# Altium PCB Arduino NG Ahuratus-PCB.PcbDoc (part 3 of 6)
Units mm, origin at the board's own origin, x right, y up, seen from the top; angles counter-clockwise.
Board outline 69 x 53.5 mm, 2 copper layers (Top Layer, Bottom Layer); 37 components, 49 nets, 193 pads, 40 vias.
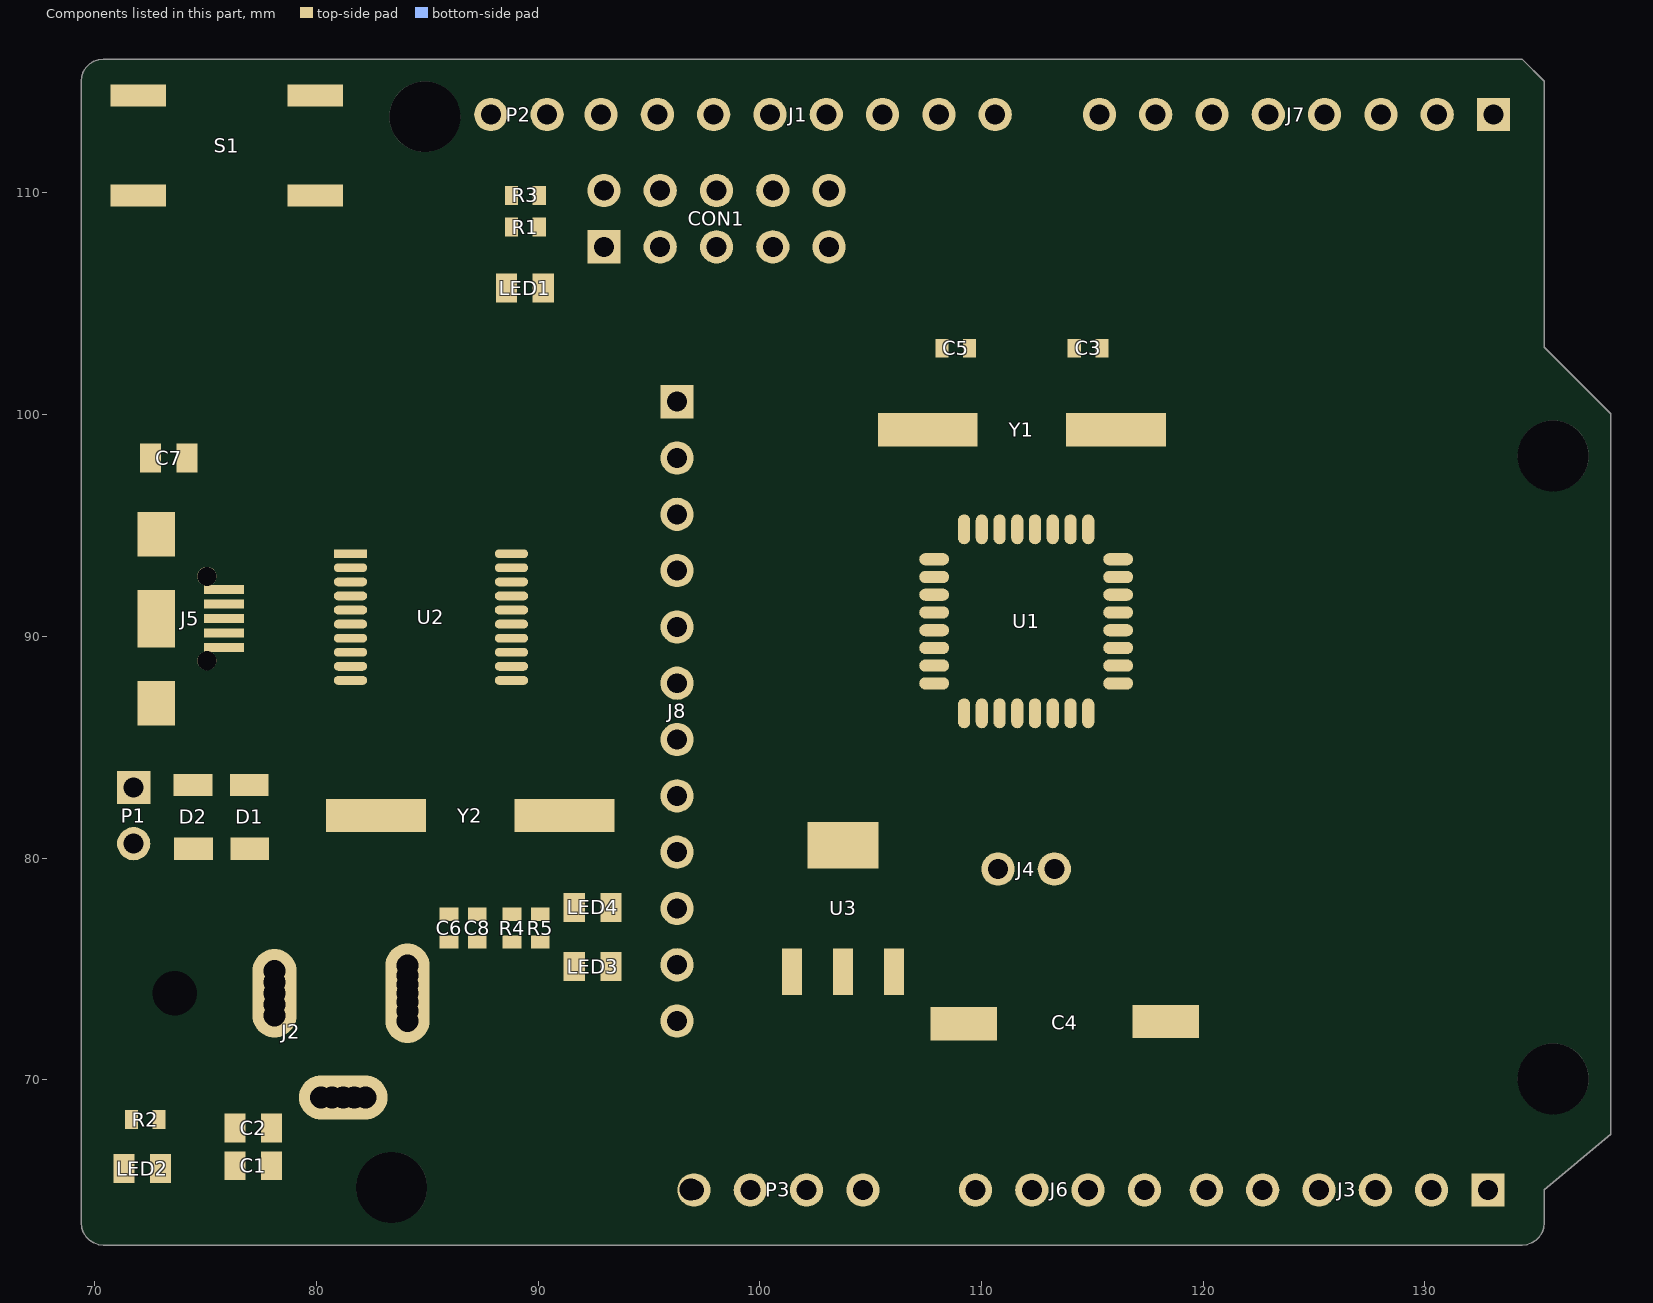
[diagram p3: the components of this part, seen from the top]

## Via types
v1: diameter 1.27, hole 0.711, Top Layer to Bottom Layer, 40 vias

## Nets (pads, with @x,y where several pads share a name; then routed paths per layer and width w, separated by ;. In a path a pad name is that pad's centre, name@x,y a point inside that pad or via, vN(x,y) a via of type N, cw(c..) or ccw(c..) an arc to the next point about the centre after c; other vN are vias at no path point) (continued)
copper on no net: (continued)
  Bottom Layer w0.025: 77.978,80.264 78.181,80.264 ; 77.978,80.289 78.181,80.289 ; 77.978,80.315 78.181,80.315 ; 77.978,80.34 78.156,80.34 ; 77.978,80.366 78.156,80.366 ; 77.978,80.391 78.156,80.391 ; 77.978,80.416 78.156,80.416 ; 77.978,80.442 78.156,80.442 ; 77.978,80.467 78.156,80.467 ; 77.978,80.493 78.156,80.493 ; 77.978,80.518 78.181,80.518 ; 77.978,80.543 78.181,80.543 ; 77.978,80.569 78.181,80.569 ; 77.978,80.594 78.181,80.594 ; 77.978,80.62 78.181,80.62 ; 77.978,80.645 78.207,80.645 ; 78.003,80.137 78.207,80.137 ; 78.003,80.162 78.207,80.162 ; 78.003,80.188 78.207,80.188 ; 78.003,80.213 78.181,80.213 ; 78.003,80.239 78.181,80.239 ; 78.003,80.67 78.207,80.67 ; 78.003,80.696 78.207,80.696 ; 78.003,80.721 78.232,80.721 ; 78.003,80.747 78.232,80.747 ; 78.029,80.061 78.232,80.061 ; 78.029,80.086 78.232,80.086 ; 78.029,80.112 78.232,80.112 ; 78.029,80.772 78.232,80.772 ; 78.029,80.797 78.257,80.797 ; 78.029,80.823 78.257,80.823 ; 78.054,80.01 78.283,80.01 ; 78.054,80.035 78.257,80.035 ; 78.054,80.848 78.283,80.848 ; 78.054,80.874 78.308,80.874 ; 78.08,79.959 78.308,79.959 ; 78.08,79.985 78.283,79.985 ; 78.08,80.899 78.308,80.899 ; 78.105,79.908 78.334,79.908 ; 78.105,79.934 78.308,79.934 ; 78.105,80.924 78.334,80.924 ; 78.105,80.95 78.359,80.95 ; 78.13,79.858 78.384,79.858 ; 78.13,79.883 78.359,79.883 ; 78.13,80.975 78.359,80.975 ; 78.13,81.001 78.384,81.001 ; 78.156,79.832 78.41,79.832 ; 78.156,81.026 78.41,81.026 ; 78.181,79.781 78.461,79.781 ; 78.181,79.807 78.435,79.807 ; 78.181,81.051 78.435,81.051 ; 78.181,81.077 78.461,81.077 ; 78.207,79.756 78.486,79.756 ; 78.207,81.102 78.486,81.102 ; 78.232,79.731 78.511,79.731 ; 78.232,81.128 78.537,81.128 ; 78.257,79.705 78.562,79.705 ; 78.257,81.153 78.562,81.153 ; 78.257,81.178 78.613,81.178 ; 78.283,79.68 78.613,79.68 ; 78.283,81.204 78.638,81.204 ; 78.308,79.654 78.664,79.654 ; 78.308,81.229 78.689,81.229 ; 78.334,81.255 78.765,81.255 ; 78.359,79.629 78.715,79.629 ; 78.359,81.28 78.842,81.28 ; 78.384,79.604 78.791,79.604 ; 78.384,81.305 79.807,81.305 ; 78.41,79.578 78.918,79.578 ; 78.435,81.331 79.781,81.331 ; 78.461,79.553 79.705,79.553 ; 78.461,81.356 79.756,81.356 ; 78.486,79.527 79.705,79.527 ; 78.511,81.382 79.756,81.382 ; 78.537,79.502 79.705,79.502 ; 78.562,81.407 79.756,81.407 ; 78.588,79.477 79.477,79.477 ; 78.588,83.007 79.502,83.007 ; 78.588,83.033 79.502,83.033 ; 78.588,83.058 79.502,83.058 ; 78.588,83.083 79.502,83.083 ; 78.588,83.109 79.477,83.109 ; 78.588,83.134 79.477,83.134 ; 78.613,82.779 79.502,82.779 ; 78.613,82.804 79.502,82.804 ; 78.613,82.829 79.502,82.829 ; 78.613,82.855 79.502,82.855 ; 78.613,82.88 79.502,82.88 ; 78.613,82.906 79.502,82.906 ; 78.613,82.931 79.502,82.931 ; 78.613,82.956 79.502,82.956 ; 78.613,82.982 79.502,82.982 ; 78.613,83.16 79.477,83.16 ; 78.638,79.451 79.4,79.451 ; 78.638,81.432 79.731,81.432 ; 78.638,82.575 79.426,82.575 ; 78.638,82.601 79.451,82.601 ; 78.638,82.626 79.451,82.626 ; 78.638,82.652 79.477,82.652 ; 78.638,82.677 79.502,82.677 ; 78.638,82.702 79.502,82.702 ; 78.638,82.728 79.502,82.728 ; 78.638,82.753 79.502,82.753 ; 78.638,83.185 79.477,83.185 ; 78.664,82.372 79.299,82.372 ; 78.664,82.398 79.299,82.398 ; 78.664,82.423 79.324,82.423 ; 78.664,82.448 79.35,82.448 ; 78.664,82.474 79.35,82.474 ; 78.664,82.499 79.375,82.499 ; 78.664,82.525 79.4,82.525 ; 78.664,82.55 79.4,82.55 ; 78.689,81.458 79.731,81.458 ; 78.689,82.22 79.197,82.22 ; 78.689,82.245 79.223,82.245 ; 78.689,82.271 79.223,82.271 ; 78.689,82.296 79.248,82.296 ; 78.689,82.321 79.273,82.321 ; 78.689,82.347 79.273,82.347 ; 78.689,83.21 79.477,83.21 ; 78.715,82.144 79.146,82.144 ; 78.715,82.169 79.172,82.169 ; 78.715,82.194 79.172,82.194 ; 78.715,83.236 79.477,83.236 ; 78.74,79.426 79.324,79.426 ; 78.74,81.483 79.705,81.483 ; 78.74,82.067 79.096,82.067 ; 78.74,82.093 79.121,82.093 ; 78.74,82.118 79.121,82.118 ; 78.74,83.261 79.477,83.261 ; 78.765,82.017 79.07,82.017 ; 78.765,82.042 79.096,82.042 ; 78.765,84.201 79.629,84.201 ; 78.765,84.226 79.629,84.226 ; 78.765,84.252 79.629,84.252 ; 78.765,84.277 79.654,84.277 ; 78.765,84.303 79.654,84.303 ; 78.765,84.328 79.654,84.328 ; 78.765,84.353 79.68,84.353 ; 78.765,84.379 79.68,84.379 ; 78.765,84.404 79.68,84.404 ; 78.765,84.43 79.705,84.43 ; 78.791,81.94 79.019,81.94 ; 78.791,81.966 79.045,81.966 ; 78.791,81.991 79.07,81.991 ; 78.791,83.287 79.477,83.287 ; 78.791,84.455 79.705,84.455 ; 78.791,84.48 79.705,84.48 ; 78.791,84.506 79.731,84.506 ; 78.791,84.531 79.731,84.531 ; 78.791,84.557 79.731,84.557 ; 78.791,84.582 79.756,84.582 ; 78.816,81.509 79.705,81.509 ; 78.816,81.89 78.969,81.89 ; 78.816,81.915 78.994,81.915 ; 78.816,83.312 79.477,83.312 ; 78.816,84.176 79.604,84.176 ; 78.816,84.607 79.756,84.607 ; 78.816,84.633 79.781,84.633 ; 78.816,84.658 79.781,84.658 ; 78.816,84.684 79.781,84.684 ; 78.842,81.864 78.918,81.864 ; 78.842,84.15 79.604,84.15 ; 78.842,84.709 79.807,84.709 ; 78.842,84.734 79.807,84.734 ; 78.842,84.76 79.832,84.76 ; 78.842,84.785 79.832,84.785 ; 78.867,79.4 79.223,79.4 ; 78.867,81.534 79.705,81.534 ; 78.867,83.337 79.477,83.337 ; 78.867,84.125 79.578,84.125 ; 78.867,84.811 79.858,84.811 ; 78.867,84.836 79.858,84.836 ; 78.892,83.363 79.477,83.363 ; 78.892,84.099 79.578,84.099 ; 78.892,84.861 79.883,84.861 ; 78.892,84.887 79.883,84.887 ; 78.892,84.912 79.908,84.912 ; 78.918,81.559 79.68,81.559 ; 78.918,84.938 79.908,84.938 ; 78.918,84.963 79.934,84.963 ; 78.943,81.585 79.68,81.585 ; 78.943,83.388 79.477,83.388 ; 78.943,83.414 79.477,83.414 ; 78.943,83.439 79.477,83.439 ; 78.943,84.074 79.578,84.074 ; 78.943,84.988 79.959,84.988 ; 78.943,85.014 79.959,85.014 ; 78.969,83.464 79.477,83.464 ; 78.969,83.49 79.477,83.49 ; 78.969,83.515 79.477,83.515 ; 78.969,83.541 79.477,83.541 ; 78.969,83.566 79.477,83.566 ; 78.969,83.591 79.477,83.591 ; 78.969,83.617 79.477,83.617 ; 78.969,84.049 79.553,84.049 ; 78.969,85.039 79.985,85.039 ; 78.969,85.065 79.985,85.065 ; 78.994,83.642 79.477,83.642 ; 78.994,83.668 79.477,83.668 ; 78.994,83.693 79.477,83.693 ; 78.994,83.718 79.477,83.718 ; 78.994,83.744 79.502,83.744 ; 78.994,83.769 79.502,83.769 ; 78.994,84.023 79.553,84.023 ; 78.994,85.09 80.01,85.09 ; 79.019,81.61 79.68,81.61 ; 79.019,83.795 79.502,83.795 ; 79.019,83.82 79.502,83.82 ; 79.019,83.845 79.502,83.845 ; 79.019,83.871 79.527,83.871 ; 79.019,83.896 79.527,83.896 ; 79.019,83.922 79.527,83.922 ; 79.019,85.115 80.035,85.115 ; 79.019,85.141 80.035,85.141 ; 79.045,83.947 79.527,83.947 ; 79.045,83.972 79.553,83.972 ; 79.045,83.998 79.553,83.998 ; 79.045,85.166 80.061,85.166 ; 79.07,85.192 80.086,85.192 ; 79.07,85.217 79.426,85.217 ; 79.096,81.636 79.68,81.636 ; 79.121,79.578 79.705,79.578 ; 79.146,81.661 79.68,81.661 ; 79.172,81.686 79.68,81.686 ; 79.197,81.712 79.654,81.712 ; 79.197,81.737 79.654,81.737 ; 79.223,81.763 79.654,81.763 ; 79.223,81.788 79.654,81.788 ; 79.248,81.28 79.807,81.28 ; 79.248,81.813 79.654,81.813 ; 79.248,81.839 79.654,81.839 ; 79.273,81.864 79.629,81.864 ; 79.273,81.89 79.629,81.89 ; 79.273,81.915 79.629,81.915 ; 79.299,79.604 79.731,79.604 ; 79.299,81.94 79.629,81.94 ; 79.299,81.966 79.629,81.966 ; 79.324,81.991 79.629,81.991 ; 79.324,82.017 79.629,82.017 ; 79.324,82.042 79.629,82.042 ; 79.35,79.629 79.731,79.629 ; 79.35,81.255 79.832,81.255 ; 79.35,82.067 79.629,82.067 ; 79.35,82.093 79.629,82.093 ; 79.375,78.943 79.604,78.943 ; 79.375,78.969 79.604,78.969 ; 79.375,78.994 79.604,78.994 ; 79.375,82.118 79.629,82.118 ; 79.375,82.144 79.629,82.144 ; 79.4,78.715 79.604,78.715 ; 79.4,78.74 79.604,78.74 ; 79.4,78.765 79.604,78.765 ; 79.4,78.791 79.604,78.791 ; 79.4,78.816 79.604,78.816 ; 79.4,78.842 79.604,78.842 ; 79.4,78.867 79.604,78.867 ; 79.4,78.892 79.604,78.892 ; 79.4,78.918 79.604,78.918 ; 79.4,79.019 79.604,79.019 ; 79.4,79.045 79.604,79.045 ; 79.4,79.07 79.604,79.07 ; 79.4,79.096 79.604,79.096 ; 79.4,79.121 79.604,79.121 ; 79.4,79.146 79.604,79.146 ; 79.4,79.172 79.604,79.172 ; 79.4,79.654 79.756,79.654 ; 79.4,81.229 79.832,81.229 ; 79.4,82.169 79.629,82.169 ; 79.4,82.194 79.629,82.194 ; 79.426,78.588 79.629,78.588 ; 79.426,78.613 79.629,78.613 ; 79.426,78.638 79.629,78.638 ; 79.426,78.664 79.604,78.664 ; 79.426,78.689 79.604,78.689 ; 79.426,79.197 79.604,79.197 ; 79.426,79.223 79.604,79.223 ; 79.426,79.248 79.629,79.248 ; 79.426,79.273 79.629,79.273 ; 79.426,82.22 79.629,82.22 ; 79.451,78.511 79.654,78.511 ; 79.451,78.537 79.654,78.537 ; 79.451,78.562 79.629,78.562 ; 79.451,79.299 79.629,79.299 ; 79.451,79.324 79.629,79.324 ; 79.451,79.35 79.654,79.35 ; 79.451,79.68 79.781,79.68 ; 79.451,81.204 79.858,81.204 ; 79.451,82.245 79.629,82.245 ; 79.451,82.271 79.629,82.271 ; 79.477,78.435 79.705,78.435 ; 79.477,78.461 79.68,78.461 ; 79.477,78.486 79.68,78.486 ; 79.477,79.375 79.654,79.375 ; 79.477,79.4 79.68,79.4 ; 79.477,79.426 79.68,79.426 ; 79.477,82.296 79.629,82.296 ; 79.502,78.384 79.731,78.384 ; 79.502,78.41 79.705,78.41 ; 79.502,79.451 79.68,79.451 ; 79.502,79.477 79.705,79.477 ; 79.502,79.705 79.781,79.705 ; 79.502,81.178 79.858,81.178 ; 79.502,82.321 79.604,82.321 ; 79.527,78.334 79.756,78.334 ; 79.527,78.359 79.731,78.359 ; 79.527,79.731 79.807,79.731 ; 79.527,81.153 79.883,81.153 ; 79.527,85.217 80.086,85.217 ; 79.527,85.242 80.112,85.242 ; 79.553,78.283 79.807,78.283 ; 79.553,78.308 79.781,78.308 ; 79.553,79.756 79.832,79.756 ; 79.553,81.128 79.883,81.128 ; 79.553,85.268 80.137,85.268 ; 79.578,78.232 79.858,78.232 ; 79.578,78.257 79.832,78.257 ; 79.578,79.781 79.832,79.781 ; 79.578,81.102 79.908,81.102 ; 79.578,85.293 80.162,85.293 ; 79.604,78.207 79.883,78.207 ; 79.604,79.807 79.858,79.807 ; 79.604,81.077 79.908,81.077 ; 79.604,85.319 80.162,85.319 ; 79.604,85.344 80.188,85.344 ; 79.629,78.156 79.934,78.156 ; 79.629,78.181 79.908,78.181 ; 79.629,79.832 79.883,79.832 ; 79.629,81.051 79.934,81.051 ; 79.629,85.369 80.213,85.369 ; 79.654,78.13 79.959,78.13 ; 79.654,79.858 79.883,79.858 ; 79.654,81.026 79.934,81.026 ; 79.654,85.395 80.239,85.395 ; 79.654,85.42 80.264,85.42 ; 79.654,86.03 81.001,86.03 ; 79.654,86.055 81.051,86.055 ; 79.68,78.105 79.985,78.105 ; 79.68,79.883 79.908,79.883 ; 79.68,79.908 79.908,79.908 ; 79.68,80.975 79.959,80.975 ; 79.68,81.001 79.959,81.001 ; 79.68,85.446 80.289,85.446 ; 79.68,85.954 80.874,85.954 ; 79.68,85.979 80.924,85.979 ; 79.68,86.004 80.95,86.004 ; 79.68,86.081 81.077,86.081 ; 79.705,78.08 80.01,78.08 ; 79.705,79.934 79.934,79.934 ; 79.705,80.924 79.985,80.924 ; 79.705,80.95 79.985,80.95 ; 79.705,85.471 80.289,85.471 ; 79.705,85.852 80.721,85.852 ; 79.705,85.877 80.772,85.877 ; 79.705,85.903 80.797,85.903 ; 79.705,85.928 80.823,85.928 ; 79.705,86.106 81.128,86.106 ; 79.731,78.054 80.061,78.054 ; 79.731,79.959 79.959,79.959 ; 79.731,79.985 79.959,79.985 ; 79.731,80.874 80.01,80.874 ; 79.731,80.899 79.985,80.899 ; 79.731,85.496 80.315,85.496 ; 79.731,85.522 80.34,85.522 ; 79.731,85.776 80.62,85.776 ; 79.731,85.801 80.645,85.801 ; 79.731,85.827 80.696,85.827 ; 79.731,86.131 81.178,86.131 ; 79.756,78.029 80.086,78.029 ; 79.756,80.01 79.985,80.01 ; 79.756,80.035 79.985,80.035 ; 79.756,80.823 80.01,80.823 ; 79.756,80.848 80.01,80.848 ; 79.756,85.547 80.366,85.547 ; 79.756,85.7 80.543,85.7 ; 79.756,85.725 80.569,85.725 ; 79.756,85.75 80.594,85.75 ; 79.756,86.157 81.229,86.157 ; 79.781,78.003 80.137,78.003 ; 79.781,79.451 79.883,79.451 ; 79.781,79.477 79.908,79.477 ; 79.781,79.502 79.934,79.502 ; 79.781,79.527 79.959,79.527 ; 79.781,79.553 79.985,79.553 ; 79.781,80.061 80.01,80.061 ; 79.781,80.086 80.01,80.086 ; 79.781,80.112 80.01,80.112 ; 79.781,80.747 80.035,80.747 ; 79.781,80.772 80.035,80.772 ; 79.781,80.797 80.035,80.797 ; 79.781,85.573 80.391,85.573 ; 79.781,85.598 80.416,85.598 ; 79.781,85.623 80.442,85.623 ; 79.781,85.649 80.467,85.649 ; 79.781,85.674 80.518,85.674 ; 79.781,86.182 81.305,86.182 ; 79.807,79.578 80.01,79.578 ; 79.807,79.604 80.035,79.604 ; 79.807,79.629 80.061,79.629 ; 79.807,80.137 80.035,80.137 ; 79.807,80.162 80.035,80.162 ; 79.807,80.188 80.035,80.188 ; 79.807,80.645 80.061,80.645 ; 79.807,80.67 80.061,80.67 ; 79.807,80.696 80.035,80.696 ; 79.807,80.721 80.035,80.721 ; 79.807,86.208 81.356,86.208 ; 79.832,77.978 80.213,77.978 ; 79.832,79.654 80.086,79.654 ; 79.832,79.68 80.112,79.68 ; 79.832,80.213 80.035,80.213 ; 79.832,80.239 80.061,80.239 ; 79.832,80.264 80.061,80.264 ; 79.832,80.289 80.061,80.289 ; 79.832,80.315 80.061,80.315 ; 79.832,80.34 80.061,80.34 ; 79.832,80.366 80.061,80.366 ; 79.832,80.467 80.061,80.467 ; 79.832,80.493 80.061,80.493 ; 79.832,80.518 80.061,80.518 ; 79.832,80.543 80.061,80.543 ; 79.832,80.569 80.061,80.569 ; 79.832,80.594 80.061,80.594 ; 79.832,80.62 80.061,80.62 ; 79.832,83.16 80.061,83.16 ; 79.832,83.185 80.035,83.185 ; 79.832,83.21 80.035,83.21 ; 79.832,83.236 80.035,83.236 ; 79.832,83.261 80.035,83.261 ; 79.832,83.287 80.035,83.287 ; 79.832,83.312 80.035,83.312 ; 79.832,83.337 80.061,83.337 ; 79.832,86.233 81.407,86.233 ; 79.858,77.953 80.289,77.953 ; 79.858,79.705 80.162,79.705 ; 79.858,80.391 80.061,80.391 ; 79.858,80.416 80.061,80.416 ; 79.858,80.442 80.061,80.442 ; 79.858,83.083 80.112,83.083 ; 79.858,83.109 80.086,83.109 ; 79.858,83.134 80.061,83.134 ; 79.858,83.363 80.061,83.363 ; 79.858,83.388 80.086,83.388 ; 79.858,83.414 80.086,83.414 ; 79.883,77.927 80.416,77.927 ; 79.883,79.731 80.188,79.731 ; 79.883,79.756 80.239,79.756 ; 79.883,82.271 80.112,82.271 ; 79.883,82.296 80.086,82.296 ; 79.883,82.321 80.086,82.321 ; 79.883,82.347 80.086,82.347 ; 79.883,82.372 80.086,82.372 ; 79.883,82.398 80.112,82.398 ; 79.883,83.033 80.162,83.033 ; 79.883,83.058 80.112,83.058 ; 79.883,83.439 80.112,83.439 ; 79.883,83.464 80.162,83.464 ; 79.883,86.258 81.483,86.258 ; 79.908,79.781 80.315,79.781 ; 79.908,79.807 80.467,79.807 ; 79.908,82.22 80.188,82.22 ; 79.908,82.245 80.137,82.245 ; 79.908,82.423 80.112,82.423 ; 79.908,82.448 80.137,82.448 ; 79.908,82.474 80.188,82.474 ; 79.908,83.007 80.188,83.007 ; 79.908,83.49 80.188,83.49 ; 79.908,86.284 81.559,86.284 ; 79.934,77.902 81.204,77.902 ; 79.934,79.832 81.305,79.832 ; 79.934,82.169 81.94,82.169 ; 79.934,82.194 80.264,82.194 ; 79.934,82.499 80.213,82.499 ; 79.934,82.956 80.264,82.956 ; 79.934,82.982 80.213,82.982 ; 79.934,83.515 80.289,83.515 ; 79.934,83.541 81.128,83.541 ; 79.934,86.309 81.61,86.309 ; 79.959,79.858 81.28,79.858 ; 79.959,79.883 81.255,79.883 ; 79.959,82.144 81.915,82.144 ; 79.959,82.525 80.289,82.525 ; 79.959,82.55 80.442,82.55 ; 79.959,82.931 80.366,82.931 ; 79.959,83.566 81.102,83.566 ; 79.959,86.335 81.712,86.335 ; 79.985,77.876 81.178,77.876 ; 79.985,79.908 81.229,79.908 ; 79.985,82.118 80.975,82.118 ; 79.985,82.575 81.991,82.575 ; 79.985,82.906 80.493,82.906 ; 79.985,83.591 81.051,83.591 ; 79.985,86.36 81.788,86.36 ; 80.01,77.851 81.128,77.851 ; 80.01,79.934 81.178,79.934 ; 80.01,79.959 81.153,79.959 ; 80.01,82.093 80.797,82.093 ; 80.01,82.601 82.017,82.601 ; 80.01,86.385 81.89,86.385 ; 80.035,79.985 81.128,79.985 ; 80.035,82.88 80.696,82.88 ; 80.035,83.617 81.026,83.617 ; 80.035,86.411 81.991,86.411 ; 80.061,77.826 81.077,77.826 ; 80.061,80.01 81.102,80.01 ; 80.061,82.067 80.62,82.067 ; 80.061,82.626 82.042,82.626 ; 80.061,82.855 80.848,82.855 ; 80.061,83.642 80.975,83.642 ; 80.086,80.035 81.077,80.035 ; 80.086,82.652 82.042,82.652 ; 80.086,86.436 82.144,86.436 ; 80.112,80.061 81.051,80.061 ; 80.112,82.829 81.001,82.829 ; 80.112,83.668 80.569,83.668 ; 80.112,86.462 82.347,86.462 ; 80.137,77.8 81.001,77.8 ; 80.137,80.086 81.026,80.086 ; 80.137,80.112 81.001,80.112 ; 80.137,82.042 80.518,82.042 ; 80.137,82.804 81.128,82.804 ; 80.137,86.487 80.721,86.487 ; 80.162,80.137 80.975,80.137 ; 80.162,82.677 82.042,82.677 ; 80.162,83.693 80.518,83.693 ; 80.162,86.512 80.696,86.512 ; 80.188,77.775 80.924,77.775 ; 80.188,80.162 80.95,80.162 ; 80.188,84.277 80.391,84.277 ; 80.188,84.303 80.391,84.303 ; 80.188,84.328 80.391,84.328 ; 80.188,84.353 80.391,84.353 ; 80.188,84.379 80.391,84.379 ; 80.188,84.404 80.391,84.404 ; 80.213,80.188 80.924,80.188 ; 80.213,82.779 81.28,82.779 ; 80.213,84.15 80.442,84.15 ; 80.213,84.176 80.442,84.176 ; 80.213,84.201 80.416,84.201 ; 80.213,84.226 80.416,84.226 ; 80.213,84.252 80.416,84.252 ; 80.213,84.43 80.416,84.43 ; 80.213,84.455 80.416,84.455 ; 80.213,84.48 80.442,84.48 ; 80.213,84.506 80.442,84.506 ; 80.213,86.538 80.645,86.538 ; 80.239,80.213 80.899,80.213 ; 80.239,80.239 80.874,80.239 ; 80.239,82.017 80.315,82.017 ; 80.239,82.702 82.042,82.702 ; 80.239,84.099 80.467,84.099 ; 80.239,84.125 80.467,84.125 ; 80.239,84.531 80.467,84.531 ; 80.239,84.557 80.518,84.557 ; 80.239,86.563 80.62,86.563 ; 80.264,80.264 80.848,80.264 ; 80.264,80.289 80.848,80.289 ; 80.264,84.049 80.493,84.049 ; 80.264,84.074 80.493,84.074 ; 80.264,84.582 80.569,84.582 ; 80.264,86.589 80.569,86.589 ; 80.289,77.749 80.823,77.749 ; 80.289,80.315 80.823,80.315 ; 80.289,80.34 80.797,80.34 ; 80.289,80.366 80.772,80.366 ; 80.289,80.391 80.747,80.391 ; 80.289,80.416 80.747,80.416 ; 80.289,80.442 80.721,80.442 ; 80.289,80.467 80.696,80.467 ; 80.289,80.493 80.696,80.493 ; 80.289,80.518 80.67,80.518 ; 80.289,80.543 80.645,80.543 ; 80.289,80.569 80.645,80.569 ; 80.289,80.594 80.62,80.594 ; 80.289,80.62 80.594,80.62 ; 80.289,80.645 80.594,80.645 ; 80.289,80.67 80.569,80.67 ; 80.289,80.696 80.569,80.696 ; 80.289,80.721 80.543,80.721 ; 80.289,80.747 80.518,80.747 ; 80.289,80.772 80.518,80.772 ; 80.289,80.797 80.493,80.797 ; 80.289,80.823 80.493,80.823 ; 80.289,80.848 80.467,80.848 ; 80.289,80.874 80.467,80.874 ; 80.289,82.753 81.432,82.753 ; 80.289,83.998 80.543,83.998 ; 80.289,84.023 80.518,84.023 ; 80.289,84.607 80.645,84.607 ; 80.289,84.633 81.102,84.633 ; 80.315,80.899 80.467,80.899 ; 80.315,80.924 80.442,80.924 ; 80.315,80.95 80.442,80.95 ; 80.315,80.975 80.416,80.975 ; 80.315,81.534 82.017,81.534 ; 80.315,81.559 80.594,81.559 ; 80.315,81.585 80.518,81.585 ; 80.315,81.61 80.518,81.61 ; 80.315,81.636 80.518,81.636 ; 80.315,81.661 80.543,81.661 ; 80.315,82.194 81.966,82.194 ; 80.315,83.947 80.594,83.947 ; 80.315,83.972 80.569,83.972 ; 80.315,84.658 81.051,84.658 ; 80.315,86.614 80.543,86.614 ; 80.34,81.483 81.128,81.483 ; 80.34,81.509 82.042,81.509 ; 80.34,81.686 80.543,81.686 ; 80.34,81.712 80.569,81.712 ; 80.34,81.737 80.594,81.737 ; 80.34,83.922 80.62,83.922 ; 80.34,84.684 81.026,84.684 ; 80.34,86.639 80.493,86.639 ; 80.366,81.458 81.001,81.458 ; 80.366,81.763 80.645,81.763 ; 80.366,81.788 80.696,81.788 ; 80.366,83.896 80.645,83.896 ; 80.366,86.665 80.467,86.665 ; 80.391,81.432 80.924,81.432 ; 80.391,81.813 80.772,81.813 ; 80.391,83.515 81.178,83.515 ; 80.391,83.871 80.67,83.871 ; 80.391,84.709 80.975,84.709 ; 80.416,81.839 80.848,81.839 ; 80.416,83.845 80.721,83.845 ; 80.416,84.734 80.95,84.734 ; 80.442,81.407 80.848,81.407 ; 80.442,81.864 80.975,81.864 ; 80.442,83.82 80.747,83.82 ; 80.467,77.724 80.62,77.724 ; 80.467,81.89 82.169,81.89 ; 80.467,82.22 81.966,82.22 ; 80.467,83.795 80.772,83.795 ; 80.493,83.49 81.204,83.49 ; 80.493,83.769 80.823,83.769 ; 80.493,84.76 80.899,84.76 ; 80.518,81.382 80.772,81.382 ; 80.518,81.915 82.118,81.915 ; 80.518,83.744 80.848,83.744 ; 80.543,83.464 81.255,83.464 ; 80.543,83.718 80.874,83.718 ; 80.569,81.94 82.042,81.94 ; 80.569,82.245 81.966,82.245 ; 80.594,82.728 81.585,82.728 ; 80.594,83.439 81.28,83.439 ; 80.594,83.693 80.924,83.693 ; 80.594,84.785 80.823,84.785 ; 80.62,81.966 81.966,81.966 ; 80.62,83.668 80.95,83.668 ; 80.645,82.55 81.94,82.55 ; 80.645,83.414 81.331,83.414 ; 80.696,81.559 81.966,81.559 ; 80.696,81.991 81.89,81.991 ; 80.696,83.388 81.356,83.388 ; 80.721,79.807 81.356,79.807 ; 80.747,83.363 81.407,83.363 ; 80.747,84.607 81.128,84.607 ; 80.772,82.271 81.991,82.271 ; 80.772,83.337 81.458,83.337 ; 80.797,77.927 81.255,77.927 ; 80.797,81.585 81.89,81.585 ; 80.797,82.017 81.788,82.017 ; 80.797,86.487 84.658,86.487 ; 80.823,79.781 81.382,79.781 ; 80.823,83.312 81.483,83.312 ; 80.823,84.582 81.153,84.582 ; 80.823,86.512 84.582,86.512 ; 80.848,82.525 81.864,82.525 ; 80.848,83.287 81.534,83.287 ; 80.874,81.61 81.839,81.61 ; 80.874,84.557 81.178,84.557 ; 80.874,86.538 84.506,86.538 ; 80.899,77.953 81.28,77.953 ; 80.899,79.756 81.407,79.756 ; 80.899,80.594 81.407,80.594 ; 80.899,80.62 81.102,80.62 ; 80.899,80.645 81.077,80.645 ; 80.899,80.67 81.077,80.67 ; 80.899,80.696 81.077,80.696 ; 80.899,80.721 81.077,80.721 ; 80.899,80.747 81.077,80.747 ; 80.899,80.772 81.102,80.772 ; 80.899,80.797 81.128,80.797 ; 80.899,83.261 81.559,83.261 ; 80.899,84.531 81.204,84.531 ; 80.924,80.543 81.382,80.543 ; 80.924,80.569 81.382,80.569 ; 80.924,80.823 81.382,80.823 ; 80.924,80.95 81.153,80.95 ; 80.924,80.975 81.102,80.975 ; 80.924,81.001 81.102,81.001 ; 80.924,81.026 81.102,81.026 ; 80.924,81.051 81.102,81.051 ; 80.924,81.077 81.102,81.077 ; 80.924,81.102 81.153,81.102 ; 80.924,81.128 81.382,81.128 ; 80.924,82.042 81.661,82.042 ; 80.924,84.506 81.229,84.506 ; 80.924,86.563 84.48,86.563 ; 80.95,79.731 81.432,79.731 ; 80.95,80.518 81.356,80.518 ; 80.95,80.848 81.356,80.848 ; 80.95,80.924 81.382,80.924 ; 80.95,81.153 81.356,81.153 ; 80.95,81.636 81.763,81.636 ; 80.95,83.236 81.61,83.236 ; 80.975,77.978 81.331,77.978 ; 80.975,79.705 81.432,79.705 ; 80.975,80.874 81.331,80.874 ; 80.975,80.899 81.356,80.899 ; 80.975,81.178 81.356,81.178 ; 80.975,82.296 81.712,82.296 ; 80.975,83.21 81.661,83.21 ; 80.975,84.48 81.255,84.48 ; 80.975,86.589 84.455,86.589 ; 81.001,80.493 81.331,80.493 ; 81.001,81.204 81.305,81.204 ; 81.001,84.455 81.509,84.455 ; 81.001,86.614 84.404,86.614 ; 81.026,78.003 81.356,78.003 ; 81.026,79.68 81.458,79.68 ; 81.026,83.185 81.686,83.185 ; 81.026,84.43 81.534,84.43 ; 81.026,85.014 81.255,85.014 ; 81.026,85.039 81.255,85.039 ; 81.026,85.065 81.229,85.065 ; 81.026,85.09 81.229,85.09 ; 81.026,85.115 81.229,85.115 ; 81.026,85.141 81.229,85.141 ; 81.026,85.166 81.229,85.166 ; 81.026,85.192 81.229,85.192 ; 81.026,85.217 81.229,85.217 ; 81.026,85.242 81.229,85.242 ; 81.026,85.268 81.229,85.268 ; 81.026,85.293 81.229,85.293 ; 81.026,85.319 81.229,85.319 ; 81.026,85.344 81.229,85.344 ; 81.026,85.369 81.229,85.369 ; 81.026,85.395 81.229,85.395 ; 81.026,85.42 81.229,85.42 ; 81.026,85.446 81.255,85.446 ; 81.051,78.029 81.382,78.029 ; 81.051,79.654 81.483,79.654 ; 81.051,81.661 81.636,81.661 ; 81.051,83.16 81.737,83.16 ; 81.051,84.404 81.534,84.404 ; 81.051,84.963 81.28,84.963 ; 81.051,84.988 81.255,84.988 ; 81.051,85.471 81.255,85.471 ; 81.051,85.496 81.28,85.496 ; 81.051,85.522 81.28,85.522 ; 81.051,86.639 84.379,86.639 ; 81.077,79.629 81.509,79.629 ; 81.077,80.467 81.255,80.467 ; 81.077,81.229 81.255,81.229 ; 81.077,82.499 81.94,82.499 ; 81.077,84.379 81.559,84.379 ; 81.077,84.887 81.305,84.887 ; 81.077,84.912 81.28,84.912 ; 81.077,84.938 81.28,84.938 ; 81.077,85.547 81.305,85.547 ; 81.077,85.573 81.305,85.573 ; 81.102,78.054 81.407,78.054 ; 81.102,79.604 81.509,79.604 ; 81.102,83.134 81.763,83.134 ; 81.102,84.353 81.559,84.353 ; 81.102,84.811 81.331,84.811 ; 81.102,84.836 81.331,84.836 ; 81.102,84.861 81.305,84.861 ; 81.102,85.598 81.331,85.598 ; 81.102,85.623 81.356,85.623 ; 81.102,86.665 84.328,86.665 ; 81.128,79.578 81.534,79.578 ; 81.128,83.109 81.813,83.109 ; 81.128,84.328 81.585,84.328 ; 81.128,84.76 81.356,84.76 ; 81.128,84.785 81.356,84.785 ; 81.128,85.649 81.407,85.649 ; 81.128,86.69 84.303,86.69 ; 81.153,78.08 81.407,78.08 ; 81.153,79.553 81.534,79.553 ; 81.153,82.067 81.407,82.067 ; 81.153,84.303 81.585,84.303 ; 81.153,84.709 81.382,84.709 ; 81.153,84.734 81.382,84.734 ; 81.153,85.674 81.483,85.674 ; 81.153,85.7 81.966,85.7 ; 81.178,78.105 81.432,78.105 ; 81.178,79.527 81.559,79.527 ; 81.178,80.797 81.407,80.797 ; 81.178,80.95 81.382,80.95 ; 81.178,81.102 81.382,81.102 ; 81.178,83.083 81.864,83.083 ; 81.178,84.252 81.636,84.252 ; 81.178,84.277 81.61,84.277 ; 81.178,84.658 81.407,84.658 ; 81.178,84.684 81.407,84.684 ; 81.178,85.725 81.94,85.725 ; 81.178,86.716 84.277,86.716 ; 81.204,78.13 81.458,78.13 ; 81.204,79.502 81.559,79.502 ; 81.204,80.62 81.407,80.62 ; 81.204,80.772 81.407,80.772 ; 81.204,80.975 81.382,80.975 ; 81.204,81.077 81.407,81.077 ; 81.204,84.226 81.636,84.226 ; 81.204,84.607 81.432,84.607 ; 81.204,84.633 81.432,84.633 ; 81.204,85.75 81.915,85.75 ; 81.229,79.451 81.585,79.451 ; 81.229,79.477 81.585,79.477 ; 81.229,80.645 81.407,80.645 ; 81.229,80.67 81.407,80.67 ; 81.229,80.696 81.432,80.696 ; 81.229,80.721 81.407,80.721 ; 81.229,80.747 81.407,80.747 ; 81.229,81.001 81.407,81.001 ; 81.229,81.026 81.407,81.026 ; 81.229,81.051 81.407,81.051 ; 81.229,83.058 81.89,83.058 ; 81.229,84.201 81.661,84.201 ; 81.229,84.557 81.458,84.557 ; 81.229,84.582 81.458,84.582 ; 81.229,85.776 81.864,85.776 ; 81.229,86.741 84.277,86.741 ; 81.255,78.156 81.458,78.156 ; 81.255,79.426 81.61,79.426 ; 81.255,84.15 81.686,84.15 ; 81.255,84.176 81.661,84.176 ; 81.255,84.506 81.483,84.506 ; 81.255,84.531 81.458,84.531 ; 81.255,86.766 84.277,86.766 ; 81.255,86.792 84.277,86.792 ; 81.255,86.817 84.277,86.817 ; 81.255,86.843 84.252,86.843 ; 81.255,86.868 84.252,86.868 ; 81.255,86.893 84.252,86.893 ; 81.255,86.919 84.252,86.919 ; 81.255,86.944 84.252,86.944 ; 81.255,86.97 84.252,86.97 ; 81.255,86.995 84.252,86.995 ; 81.255,87.02 82.448,87.02 ; 81.255,87.046 82.423,87.046 ; 81.255,87.071 82.398,87.071 ; 81.28,78.181 81.458,78.181 ; 81.28,79.375 81.636,79.375 ; 81.28,79.4 81.61,79.4 ; 81.28,83.033 81.94,83.033 ; 81.28,84.125 81.686,84.125 ; 81.28,84.48 81.509,84.48 ; 81.28,85.801 81.839,85.801 ; 81.28,87.097 82.372,87.097 ; 81.305,78.207 81.483,78.207 ; 81.305,79.324 81.636,79.324 ; 81.305,79.35 81.636,79.35 ; 81.305,84.074 81.737,84.074 ; 81.305,84.099 81.712,84.099 ; 81.331,78.232 81.483,78.232 ; 81.331,79.248 81.661,79.248 ; 81.331,79.273 81.661,79.273 ; 81.331,79.299 81.661,79.299 ; 81.331,82.474 81.966,82.474 ; 81.331,83.007 81.966,83.007 ; 81.331,84.049 81.737,84.049 ; 81.331,85.827 81.763,85.827 ; 81.356,78.257 81.509,78.257 ; 81.356,78.283 81.509,78.283 ; 81.356,78.562 82.042,78.562 ; 81.356,78.588 82.042,78.588 ; 81.356,78.613 82.067,78.613 ; 81.356,78.638 82.067,78.638 ; 81.356,78.664 82.067,78.664 ; 81.356,78.689 82.093,78.689 ; 81.356,78.715 82.093,78.715 ; 81.356,78.74 82.118,78.74 ; 81.356,79.121 81.686,79.121 ; 81.356,79.146 81.686,79.146 ; 81.356,79.172 81.686,79.172 ; 81.356,79.197 81.661,79.197 ; 81.356,79.223 81.661,79.223 ; 81.356,82.982 81.991,82.982 ; 81.356,83.998 81.763,83.998 ; 81.356,84.023 81.763,84.023 ; 81.356,87.122 82.372,87.122 ; 81.382,78.308 81.509,78.308 ; 81.382,78.537 82.042,78.537 ; 81.382,78.765 82.118,78.765 ; 81.382,78.791 82.144,78.791 ; 81.382,78.816 82.144,78.816 ; 81.382,78.842 82.169,78.842 ; 81.382,78.867 82.194,78.867 ; 81.382,78.892 81.712,78.892 ; 81.382,78.918 81.712,78.918 ; 81.382,78.943 81.712,78.943 ; 81.382,78.969 81.712,78.969 ; 81.382,78.994 81.686,78.994 ; 81.382,79.019 81.686,79.019 ; 81.382,79.045 81.686,79.045 ; 81.382,79.07 81.686,79.07 ; 81.382,79.096 81.686,79.096 ; 81.382,83.972 81.788,83.972 ; 81.407,78.334 81.534,78.334 ; 81.407,78.359 81.534,78.359 ; 81.407,78.384 81.559,78.384 ; 81.407,78.41 82.017,78.41 ; 81.407,78.461 82.017,78.461 ; 81.407,78.486 82.017,78.486 ; 81.407,78.511 82.042,78.511 ; 81.407,82.956 82.245,82.956 ; 81.407,83.922 81.813,83.922 ; 81.407,83.947 81.813,83.947 ; 81.407,85.852 81.686,85.852 ; 81.432,78.435 82.017,78.435 ; 81.432,83.896 81.839,83.896 ; 81.432,87.147 82.347,87.147 ; 81.458,80.493 81.966,80.493 ; 81.458,80.518 81.966,80.518 ; 81.458,80.543 81.966,80.543 ; 81.458,80.569 81.966,80.569 ; 81.458,80.594 81.966,80.594 ; 81.458,80.62 81.966,80.62 ; 81.458,80.924 81.686,80.924 ; 81.458,80.95 81.686,80.95 ; 81.458,80.975 81.661,80.975 ; 81.458,81.001 81.661,81.001 ; 81.458,81.026 81.661,81.026 ; 81.458,81.051 81.686,81.051 ; 81.458,81.077 81.94,81.077 ; 81.458,82.931 82.245,82.931 ; 81.458,83.845 81.864,83.845 ; 81.458,83.871 81.864,83.871 ; 81.483,80.874 81.737,80.874 ; 81.483,80.899 81.712,80.899 ; 81.483,81.102 81.94,81.102 ; 81.483,81.128 81.94,81.128 ; 81.483,83.82 81.89,83.82 ; 81.509,80.848 81.788,80.848 ; 81.509,81.153 81.94,81.153 ; 81.509,82.906 82.245,82.906 ; 81.509,83.769 81.915,83.769 ; 81.509,83.795 81.89,83.795 ; 81.509,87.173 82.321,87.173 ; 81.534,80.823 81.813,80.823 ; 81.534,81.178 81.915,81.178 ; 81.534,82.448 81.966,82.448 ; 81.534,82.88 82.245,82.88 ; 81.534,83.744 81.94,83.744 ; 81.559,80.797 81.839,80.797 ; 81.559,81.483 82.093,81.483 ; 81.559,83.693 81.966,83.693 ; 81.559,83.718 81.94,83.718 ; 81.585,80.772 81.864,80.772 ; 81.585,81.204 81.864,81.204 ; 81.585,82.855 82.245,82.855 ; 81.585,83.668 81.991,83.668 ; 81.585,87.198 82.296,87.198 ; 81.61,80.747 81.89,80.747 ; 81.61,81.864 82.22,81.864 ; 81.61,83.617 82.017,83.617 ; 81.61,83.642 81.991,83.642 ; 81.61,85.674 81.991,85.674 ; 81.636,78.384 81.991,78.384 ; 81.636,82.829 82.245,82.829 ; 81.636,83.566 82.042,83.566 ; 81.636,83.591 82.042,83.591 ; 81.661,78.232 81.864,78.232 ; 81.661,78.257 81.864,78.257 ; 81.661,78.283 81.864,78.283 ; 81.661,78.308 81.864,78.308 ; 81.661,78.334 81.864,78.334 ; 81.661,78.359 81.864,78.359 ; 81.661,80.721 81.915,80.721 ; 81.661,83.541 82.067,83.541 ; 81.661,87.224 82.271,87.224 ; 81.686,78.105 81.89,78.105 ; 81.686,78.13 81.864,78.13 ; 81.686,78.156 81.864,78.156 ; 81.686,78.181 81.864,78.181 ; 81.686,78.207 81.864,78.207 ; 81.686,80.696 81.94,80.696 ; 81.686,81.458 82.118,81.458 ; 81.686,82.118 81.839,82.118 ; 81.686,82.423 81.991,82.423 ; 81.686,82.804 82.22,82.804 ; 81.686,83.49 82.118,83.49 ; 81.686,83.515 82.093,83.515 ; 81.712,77.927 81.94,77.927 ; 81.712,77.953 81.94,77.953 ; 81.712,77.978 81.915,77.978 ; 81.712,78.003 81.915,78.003 ; 81.712,78.029 81.89,78.029 ; 81.712,78.054 81.89,78.054 ; 81.712,78.08 81.89,78.08 ; 81.712,80.035 81.89,80.035 ; 81.712,80.061 81.839,80.061 ; 81.712,80.086 81.788,80.086 ; 81.712,80.67 81.94,80.67 ; 81.712,83.464 82.118,83.464 ; 81.712,85.649 82.017,85.649 ; 81.737,77.876 81.991,77.876 ; 81.737,77.902 81.966,77.902 ; 81.737,79.985 81.966,79.985 ; 81.737,80.01 81.94,80.01 ; 81.737,80.645 81.966,80.645 ; 81.737,81.839 82.271,81.839 ; 81.737,82.779 82.22,82.779 ; 81.737,83.414 82.169,83.414 ; 81.737,83.439 82.144,83.439 ; 81.737,87.249 82.271,87.249 ; 81.763,77.826 82.017,77.826 ; 81.763,77.851 81.991,77.851 ; 81.763,78.892 82.22,78.892 ; 81.763,79.934 82.067,79.934 ; 81.763,79.959 82.017,79.959 ; 81.763,81.432 82.144,81.432 ; 81.763,82.296 81.991,82.296 ; 81.763,82.398 81.991,82.398 ; 81.763,82.753 82.144,82.753 ; 81.763,83.363 82.194,83.363 ; 81.763,83.388 82.169,83.388 ; 81.763,85.623 82.042,85.623 ; 81.788,77.775 82.067,77.775 ; 81.788,77.8 82.042,77.8 ; 81.788,78.918 82.245,78.918 ; 81.788,79.883 82.144,79.883 ; 81.788,79.908 82.118,79.908 ; 81.788,82.321 81.991,82.321 ; 81.788,82.347 81.991,82.347 ; 81.788,82.372 81.991,82.372 ; 81.788,83.337 82.22,83.337 ; 81.788,85.598 82.042,85.598 ; 81.813,77.749 82.093,77.749 ; 81.813,78.943 82.271,78.943 ; 81.813,79.832 82.245,79.832 ; 81.813,79.858 82.194,79.858 ; 81.813,81.051 81.94,81.051 ; 81.813,82.728 82.042,82.728 ; 81.813,83.287 82.245,83.287 ; 81.813,83.312 82.245,83.312 ; 81.813,85.573 82.067,85.573 ; 81.839,77.699 82.144,77.699 ; 81.839,77.724 82.118,77.724 ; 81.839,78.969 82.296,78.969 ; 81.839,79.781 82.372,79.781 ; 81.839,79.807 82.296,79.807 ; 81.839,81.407 82.194,81.407 ; 81.839,81.813 82.296,81.813 ; 81.839,83.261 82.271,83.261 ; 81.839,85.522 82.093,85.522 ; 81.839,85.547 82.093,85.547 ; 81.839,87.274 82.245,87.274 ; 81.864,77.673 82.169,77.673 ; 81.864,78.994 82.321,78.994 ; 81.864,79.731 82.525,79.731 ; 81.864,79.756 82.448,79.756 ; 81.864,81.026 81.94,81.026 ; 81.864,81.382 82.22,81.382 ; 81.864,83.21 82.321,83.21 ; 81.864,83.236 82.093,83.236 ; 81.864,85.471 82.118,85.471 ; 81.864,85.496 82.118,85.496 ; 81.89,77.648 82.194,77.648 ; 81.89,79.019 82.372,79.019 ; 81.89,79.68 82.601,79.68 ; 81.89,79.705 82.55,79.705 ; 81.89,83.185 82.347,83.185 ; 81.89,85.42 82.144,85.42 ; 81.89,85.446 82.118,85.446 ; 81.915,77.622 82.22,77.622 ; 81.915,79.045 82.398,79.045 ; 81.915,79.629 82.626,79.629 ; 81.915,79.654 82.626,79.654 ; 81.915,81.356 82.245,81.356 ; 81.915,81.788 82.347,81.788 ; 81.915,83.134 82.169,83.134 ; 81.915,83.16 82.144,83.16 ; 81.915,85.369 82.144,85.369 ; 81.915,85.395 82.144,85.395 ; 81.94,77.597 82.271,77.597 ; 81.94,79.07 82.448,79.07 ; 81.94,79.096 82.499,79.096 ; 81.94,79.578 82.601,79.578 ; 81.94,79.604 82.626,79.604 ; 81.94,83.109 82.194,83.109 ; 81.94,85.319 82.169,85.319 ; 81.94,85.344 82.169,85.344 ; 81.94,87.3 82.22,87.3 ; 81.966,77.572 82.296,77.572 ; 81.966,79.121 82.575,79.121 ; 81.966,79.426 82.22,79.426 ; 81.966,79.451 82.245,79.451 ; 81.966,79.477 82.296,79.477 ; 81.966,79.502 82.372,79.502 ; 81.966,79.527 82.448,79.527 ; 81.966,79.553 82.525,79.553 ; 81.966,81.331 82.245,81.331 ; 81.966,81.763 82.372,81.763 ; 81.966,83.083 82.22,83.083 ; 81.966,85.242 82.194,85.242 ; 81.966,85.268 82.194,85.268 ; 81.966,85.293 82.194,85.293 ; 81.991,77.546 82.347,77.546 ; 81.991,79.146 82.652,79.146 ; 81.991,79.324 82.118,79.324 ; 81.991,79.35 82.118,79.35 ; 81.991,79.375 82.144,79.375 ; 81.991,79.4 82.169,79.4 ; 81.991,81.305 82.271,81.305 ; 81.991,83.033 82.22,83.033 ; 81.991,83.058 82.22,83.058 ; 81.991,85.166 82.22,85.166 ; 81.991,85.192 82.22,85.192 ; 81.991,85.217 82.194,85.217 ; 82.017,77.521 82.372,77.521 ; 82.017,79.172 82.804,79.172 ; 82.017,79.299 82.067,79.299 ; 82.017,81.28 82.296,81.28 ; 82.017,83.007 82.245,83.007 ; 82.017,85.09 82.245,85.09 ; 82.017,85.115 82.245,85.115 ; 82.017,85.141 82.22,85.141 ; 82.042,77.495 82.423,77.495 ; 82.042,79.197 83.769,79.197 ; 82.042,81.255 82.321,81.255 ; 82.042,81.737 82.398,81.737 ; 82.042,82.982 82.245,82.982 ; 82.042,85.014 82.271,85.014 ; 82.042,85.039 82.245,85.039 ; 82.042,85.065 82.245,85.065 ; 82.042,87.325 82.194,87.325 ; 82.067,77.47 82.474,77.47 ; 82.067,79.223 83.744,79.223 ; 82.067,81.229 82.321,81.229 ; 82.067,82.093 82.525,82.093 ; 82.067,82.118 82.499,82.118 ; 82.067,82.144 82.448,82.144 ; 82.067,82.169 82.398,82.169 ; 82.067,82.194 82.347,82.194 ; 82.067,84.912 82.296,84.912 ; 82.067,84.938 82.271,84.938 ; 82.067,84.963 82.271,84.963 ; 82.067,84.988 82.271,84.988 ; 82.093,77.445 82.55,77.445 ; 82.093,80.289 82.601,80.289 ; 82.093,80.315 82.626,80.315 ; 82.093,80.34 82.296,80.34 ; 82.093,80.366 82.296,80.366 ; 82.093,80.391 82.296,80.391 ; 82.093,80.416 82.296,80.416 ; 82.093,80.442 82.296,80.442 ; 82.093,80.467 82.321,80.467 ; 82.093,81.204 82.347,81.204 ; 82.093,81.712 82.448,81.712 ; 82.093,82.22 82.296,82.22 ; 82.093,82.245 82.296,82.245 ; 82.093,82.271 82.321,82.271 ; 82.093,84.811 82.296,84.811 ; 82.093,84.836 82.296,84.836 ; 82.093,84.861 82.296,84.861 ; 82.093,84.887 82.296,84.887 ; 82.118,79.248 83.744,79.248 ; 82.118,80.239 82.55,80.239 ; 82.118,80.264 82.575,80.264 ; 82.118,80.493 82.321,80.493 ; 82.118,80.518 82.321,80.518 ; 82.118,80.543 82.347,80.543 ; 82.118,81.178 82.347,81.178 ; 82.118,82.296 82.321,82.296 ; 82.118,82.321 82.347,82.321 ; 82.118,82.347 82.347,82.347 ; 82.118,83.236 82.296,83.236 ; 82.118,84.684 82.321,84.684 ; 82.118,84.709 82.321,84.709 ; 82.118,84.734 82.321,84.734 ; 82.118,84.76 82.321,84.76 ; 82.118,84.785 82.321,84.785 ; 82.118,87.351 82.169,87.351 ; 82.144,77.419 82.652,77.419 ; 82.144,79.273 83.744,79.273 ; 82.144,80.213 82.525,80.213 ; 82.144,80.569 82.347,80.569 ; 82.144,80.594 82.372,80.594 ; 82.144,80.62 82.372,80.62 ; 82.144,81.128 82.372,81.128 ; 82.144,81.153 82.347,81.153 ; 82.144,81.686 82.474,81.686 ; 82.144,82.067 82.575,82.067 ; 82.144,82.372 82.372,82.372 ; 82.144,82.398 82.372,82.398 ; 82.144,84.557 82.347,84.557 ; 82.144,84.582 82.347,84.582 ; 82.144,84.607 82.347,84.607 ; 82.144,84.633 82.347,84.633 ; 82.144,84.658 82.347,84.658 ; 82.169,77.394 83.49,77.394 ; 82.169,79.299 83.744,79.299 ; 82.169,80.188 82.499,80.188 ; 82.169,80.645 82.372,80.645 ; 82.169,80.67 82.398,80.67 ; 82.169,81.051 82.398,81.051 ; 82.169,81.077 82.372,81.077 ; 82.169,81.102 82.372,81.102 ; 82.169,81.661 82.499,81.661 ; 82.169,82.423 82.398,82.423 ; 82.169,82.448 82.398,82.448 ; 82.169,83.16 82.575,83.16 ; 82.169,84.455 82.372,84.455 ; 82.169,84.48 82.372,84.48 ; 82.169,84.506 82.372,84.506 ; 82.169,84.531 82.372,84.531 ; 82.194,77.368 83.439,77.368 ; 82.194,79.324 83.744,79.324 ; 82.194,80.696 82.398,80.696 ; 82.194,80.721 82.398,80.721 ; 82.194,80.747 82.398,80.747 ; 82.194,80.772 82.398,80.772 ; 82.194,80.899 82.398,80.899 ; 82.194,80.924 82.398,80.924 ; 82.194,80.95 82.398,80.95 ; 82.194,80.975 82.398,80.975 ; 82.194,81.001 82.398,81.001 ; 82.194,81.026 82.398,81.026 ; 82.194,82.474 82.423,82.474 ; 82.194,82.499 82.448,82.499 ; 82.194,83.134 82.575,83.134 ; 82.194,84.303 82.398,84.303 ; 82.194,84.328 82.398,84.328 ; 82.194,84.353 82.398,84.353 ; 82.194,84.379 82.626,84.379 ; 82.194,84.404 82.372,84.404 ; 82.194,84.43 82.372,84.43 ; 82.22,80.162 82.448,80.162 ; 82.22,80.797 82.398,80.797 ; 82.22,80.823 82.398,80.823 ; 82.22,80.848 82.398,80.848 ; 82.22,80.874 82.398,80.874 ; 82.22,81.636 82.525,81.636 ; 82.22,82.525 82.448,82.525 ; 82.22,82.55 82.474,82.55 ; 82.22,83.109 82.601,83.109 ; 82.22,84.15 82.423,84.15 ; 82.22,84.176 82.626,84.176 ; 82.22,84.201 82.626,84.201 ; 82.22,84.226 82.626,84.226 ; 82.22,84.252 82.626,84.252 ; 82.22,84.277 82.398,84.277 ; 82.245,77.343 83.388,77.343 ; 82.245,79.35 83.718,79.35 ; 82.245,81.61 82.55,81.61 ; 82.245,82.042 82.601,82.042 ; 82.245,82.575 82.499,82.575 ; 82.245,83.083 82.601,83.083 ; 82.245,83.998 82.652,83.998 ; 82.245,84.023 82.652,84.023 ; 82.245,84.049 82.652,84.049 ; 82.245,84.074 82.652,84.074 ; 82.245,84.099 82.652,84.099 ; 82.245,84.125 82.423,84.125 ; 82.271,79.375 83.718,79.375 ; 82.271,81.585 82.575,81.585 ; 82.271,82.017 82.626,82.017 ; 82.271,82.601 82.525,82.601 ; 82.271,82.626 82.55,82.626 ; 82.271,83.058 82.575,83.058 ; 82.271,83.845 82.677,83.845 ; 82.271,83.871 82.677,83.871 ; 82.271,83.896 82.677,83.896 ; 82.271,83.922 82.677,83.922 ; 82.271,83.947 82.652,83.947 ; 82.271,83.972 82.652,83.972 ; 82.296,77.318 83.363,77.318 ; 82.296,79.4 83.744,79.4 ; 82.296,81.559 82.601,81.559 ; 82.296,82.652 82.575,82.652 ; 82.296,83.033 82.575,83.033 ; 82.296,83.668 82.702,83.668 ; 82.296,83.693 82.702,83.693 ; 82.296,83.718 82.677,83.718 ; 82.296,83.744 82.677,83.744 ; 82.296,83.769 82.677,83.769 ; 82.296,83.795 82.677,83.795 ; 82.296,83.82 82.677,83.82 ; 82.321,81.991 82.652,81.991 ; 82.321,82.677 82.601,82.677 ; 82.321,83.464 82.728,83.464 ; 82.321,83.49 82.728,83.49 ; 82.321,83.515 82.728,83.515 ; 82.321,83.541 82.702,83.541 ; 82.321,83.566 82.702,83.566 ; 82.321,83.591 82.702,83.591 ; 82.321,83.617 82.702,83.617 ; 82.321,83.642 82.702,83.642 ; 82.321,85.039 82.55,85.039 ; 82.321,85.065 82.525,85.065 ; 82.321,85.09 82.525,85.09 ; 82.321,85.115 82.525,85.115 ; 82.321,85.141 82.525,85.141 ; 82.321,85.166 82.525,85.166 ; 82.321,85.192 82.525,85.192 ; 82.321,85.217 82.525,85.217 ; 82.321,85.242 82.525,85.242 ; 82.321,85.268 82.499,85.268 ; 82.321,85.293 82.499,85.293 ; 82.321,85.319 82.499,85.319 ; 82.321,85.344 82.499,85.344 ; 82.321,85.369 82.499,85.369 ; 82.321,85.395 82.499,85.395 ; 82.321,85.42 82.499,85.42 ; 82.321,85.446 82.499,85.446 ; 82.321,85.471 82.525,85.471 ; 82.321,85.496 82.525,85.496 ; 82.321,85.522 82.525,85.522 ; 82.321,85.547 82.525,85.547 ; 82.321,85.573 82.55,85.573 ; 82.321,85.598 82.55,85.598 ; 82.347,77.292 83.312,77.292 ; 82.347,79.426 83.744,79.426 ; 82.347,81.534 82.626,81.534 ; 82.347,82.702 82.626,82.702 ; 82.347,83.007 82.55,83.007 ; 82.347,83.337 82.753,83.337 ; 82.347,83.363 82.753,83.363 ; 82.347,83.388 82.728,83.388 ; 82.347,83.414 82.728,83.414 ; 82.347,83.439 82.728,83.439 ; 82.347,84.836 82.55,84.836 ; 82.347,84.861 82.55,84.861 ; 82.347,84.887 82.55,84.887 ; 82.347,84.912 82.55,84.912 ; 82.347,84.938 82.55,84.938 ; 82.347,84.963 82.55,84.963 ; 82.347,84.988 82.55,84.988 ; 82.347,85.014 82.55,85.014 ; 82.347,85.623 82.55,85.623 ; 82.347,85.649 82.575,85.649 ; 82.347,85.674 82.575,85.674 ; 82.372,80.34 82.652,80.34 ; 82.372,81.509 82.652,81.509 ; 82.372,81.966 82.652,81.966 ; 82.372,82.728 82.677,82.728 ; 82.372,82.753 82.753,82.753 ; 82.372,82.982 82.525,82.982 ; 82.372,83.185 82.575,83.185 ; 82.372,83.21 82.575,83.21 ; 82.372,83.236 83.312,83.236 ; 82.372,83.261 83.312,83.261 ; 82.372,83.287 82.829,83.287 ; 82.372,83.312 82.779,83.312 ; 82.372,84.607 82.575,84.607 ; 82.372,84.633 82.575,84.633 ; 82.372,84.658 82.575,84.658 ; 82.372,84.684 82.575,84.684 ; 82.372,84.709 82.575,84.709 ; 82.372,84.734 82.575,84.734 ; 82.372,84.76 82.575,84.76 ; 82.372,84.785 82.575,84.785 ; 82.372,84.811 82.55,84.811 ; 82.372,85.7 82.601,85.7 ; 82.372,85.725 82.601,85.725 ; 82.398,77.267 83.261,77.267 ; 82.398,79.451 83.744,79.451 ; 82.398,80.366 82.677,80.366 ; 82.398,81.483 82.652,81.483 ; 82.398,81.94 82.677,81.94 ; 82.398,82.779 83.261,82.779 ; 82.398,84.404 82.601,84.404 ; 82.398,84.43 82.601,84.43 ; 82.398,84.455 82.601,84.455 ; 82.398,84.48 82.601,84.48 ; 82.398,84.506 82.601,84.506 ; 82.398,84.531 82.601,84.531 ; 82.398,84.557 82.601,84.557 ; 82.398,84.582 82.575,84.582 ; 82.398,85.75 82.626,85.75 ; 82.398,85.776 82.652,85.776 ; 82.423,80.391 82.677,80.391 ; 82.423,81.458 82.677,81.458 ; 82.423,81.915 82.702,81.915 ; 82.423,84.277 82.626,84.277 ; 82.423,84.303 82.626,84.303 ; 82.423,84.328 82.626,84.328 ; 82.423,84.353 82.626,84.353 ; 82.423,85.801 82.652,85.801 ; 82.423,85.827 82.677,85.827 ; 82.448,79.477 83.769,79.477 ; 82.448,80.416 82.702,80.416 ; 82.448,81.432 82.702,81.432 ; 82.448,81.89 82.728,81.89 ; 82.448,82.804 83.236,82.804 ; 82.448,84.125 82.652,84.125 ; 82.448,84.15 82.652,84.15 ; 82.448,85.852 82.702,85.852 ; 82.474,77.241 83.185,77.241 ; 82.474,80.442 82.728,80.442 ; 82.474,81.407 82.702,81.407 ; 82.474,81.864 82.728,81.864 ; 82.474,82.829 83.21,82.829 ; 82.474,85.877 82.728,85.877 ; 82.474,85.903 82.753,85.903 ; 82.499,80.467 82.728,80.467 ; 82.499,81.356 83.083,81.356 ; 82.499,81.382 82.855,81.382 ; 82.499,81.839 82.753,81.839 ; 82.499,82.855 83.185,82.855 ; 82.499,85.928 82.804,85.928 ; 82.525,80.493 82.753,80.493 ; 82.525,80.518 82.753,80.518 ; 82.525,81.305 83.058,81.305 ; 82.525,81.331 82.829,81.331 ; 82.525,81.813 82.779,81.813 ; 82.525,85.954 82.855,85.954 ; 82.55,80.543 82.753,80.543 ; 82.55,80.569 82.753,80.569 ; 82.55,81.255 82.779,81.255 ; 82.55,81.28 83.058,81.28 ; 82.55,81.788 82.779,81.788 ; 82.55,82.88 83.134,82.88 ; 82.55,85.979 83.312,85.979 ; 82.575,77.216 83.083,77.216 ; 82.575,79.502 83.769,79.502 ; 82.575,80.594 82.779,80.594 ; 82.575,80.62 82.779,80.62 ; 82.575,80.645 82.779,80.645 ; 82.575,80.67 83.007,80.67 ; 82.575,80.696 82.982,80.696 ; 82.575,81.153 82.982,81.153 ; 82.575,81.178 83.007,81.178 ; 82.575,81.204 82.779,81.204 ; 82.575,81.229 82.779,81.229 ; 82.575,81.737 82.804,81.737 ; 82.575,81.763 82.804,81.763 ; 82.575,86.004 83.287,86.004 ; 82.601,80.721 82.982,80.721 ; 82.601,80.747 82.982,80.747 ; 82.601,80.772 82.982,80.772 ; 82.601,80.797 82.956,80.797 ; 82.601,80.823 82.956,80.823 ; 82.601,80.848 82.956,80.848 ; 82.601,80.874 82.956,80.874 ; 82.601,80.975 82.956,80.975 ; 82.601,81.001 82.956,81.001 ; 82.601,81.026 82.956,81.026 ; 82.601,81.051 82.956,81.051 ; 82.601,81.077 82.982,81.077 ; 82.601,81.102 82.982,81.102 ; 82.601,81.128 82.982,81.128 ; 82.601,81.686 83.033,81.686 ; 82.601,81.712 83.058,81.712 ; 82.601,82.906 83.083,82.906 ; 82.601,83.21 83.312,83.21 ; 82.601,86.03 83.261,86.03 ; 82.626,80.899 82.956,80.899 ; 82.626,80.924 82.956,80.924 ; 82.626,80.95 82.956,80.95 ; 82.626,81.636 83.007,81.636 ; 82.626,81.661 83.007,81.661 ; 82.626,83.185 83.083,83.185 ; 82.626,86.055 83.236,86.055 ; 82.652,81.585 82.956,81.585 ; 82.652,81.61 82.982,81.61 ; 82.652,83.16 83.058,83.16 ; 82.677,81.534 82.931,81.534 ; 82.677,81.559 82.956,81.559 ; 82.677,82.931 83.033,82.931 ; 82.677,86.081 83.21,86.081 ; 82.702,81.458 83.185,81.458 ; 82.702,81.483 82.906,81.483 ; 82.702,81.509 82.931,81.509 ; 82.702,83.134 83.007,83.134 ; 82.728,81.407 83.134,81.407 ; 82.728,81.432 82.88,81.432 ; 82.728,86.106 83.16,86.106 ; 82.753,79.527 83.769,79.527 ; 82.753,83.109 82.982,83.109 ; 82.779,86.131 83.083,86.131 ; 82.804,80.594 83.033,80.594 ; 82.804,80.62 83.007,80.62 ; 82.804,80.645 83.007,80.645 ; 82.804,81.204 83.007,81.204 ; 82.804,81.229 83.033,81.229 ; 82.804,81.255 83.033,81.255 ; 82.829,80.518 83.058,80.518 ; 82.829,80.543 83.058,80.543 ; 82.829,80.569 83.033,80.569 ; 82.829,81.737 83.058,81.737 ; 82.829,81.763 83.083,81.763 ; 82.855,80.467 83.109,80.467 ; 82.855,80.493 83.083,80.493 ; 82.855,81.331 83.083,81.331 ; 82.855,81.788 83.109,81.788 ; 82.88,79.553 83.795,79.553 ; 82.88,80.416 83.134,80.416 ; 82.88,80.442 83.109,80.442 ; 82.88,81.382 83.109,81.382 ; 82.88,81.813 83.134,81.813 ; 82.88,81.839 83.16,81.839 ; 82.88,87.02 84.252,87.02 ; 82.906,79.172 83.769,79.172 ; 82.906,80.391 83.16,80.391 ; 82.906,81.432 83.16,81.432 ; 82.906,81.864 83.185,81.864 ; 82.906,83.287 83.337,83.287 ; 82.931,80.34 83.236,80.34 ; 82.931,80.366 83.185,80.366 ; 82.931,81.483 83.21,81.483 ; 82.931,81.89 83.21,81.89 ; 82.956,80.315 83.464,80.315 ; 82.956,81.509 83.236,81.509 ; 82.956,81.915 83.236,81.915 ; 82.956,82.753 83.287,82.753 ; 82.956,83.312 83.337,83.312 ; 82.982,79.578 83.795,79.578 ; 82.982,80.289 83.464,80.289 ; 82.982,81.534 83.261,81.534 ; 82.982,81.94 83.287,81.94 ; 82.982,83.337 83.337,83.337 ; 82.982,83.363 83.337,83.363 ; 83.007,80.264 83.439,80.264 ; 83.007,81.559 83.287,81.559 ; 83.007,81.966 83.312,81.966 ; 83.007,82.728 83.312,82.728 ; 83.007,83.388 83.337,83.388 ; 83.007,83.414 83.363,83.414 ; 83.007,83.439 83.363,83.439 ; 83.007,85.954 83.337,85.954 ; 83.033,80.239 83.439,80.239 ; 83.033,81.585 83.337,81.585 ; 83.033,81.991 83.363,81.991 ; 83.033,83.464 83.363,83.464 ; 83.033,83.49 83.363,83.49 ; 83.033,83.515 83.388,83.515 ; 83.033,83.541 83.388,83.541 ; 83.033,83.566 83.388,83.566 ; 83.033,86.462 84.734,86.462 ; 83.058,77.419 83.541,77.419 ; 83.058,79.146 83.769,79.146 ; 83.058,80.213 83.414,80.213 ; 83.058,81.61 83.363,81.61 ; 83.058,82.017 83.414,82.017 ; 83.058,82.702 83.337,82.702 ; 83.058,83.591 83.388,83.591 ; 83.058,83.617 83.388,83.617 ; 83.058,83.642 83.414,83.642 ; 83.058,83.668 83.414,83.668 ; 83.058,83.693 83.414,83.693 ; 83.058,83.718 83.414,83.718 ; 83.058,83.744 83.414,83.744 ; 83.058,83.769 83.439,83.769 ; 83.083,79.604 83.82,79.604 ; 83.083,81.636 83.414,81.636 ; 83.083,82.042 83.464,82.042 ; 83.083,82.677 83.363,82.677 ; 83.083,83.795 83.439,83.795 ; 83.083,83.82 83.439,83.82 ; 83.083,83.845 83.439,83.845 ; 83.083,83.871 83.439,83.871 ; 83.083,83.896 83.464,83.896 ; 83.083,85.928 83.363,85.928 ; 83.083,87.046 84.252,87.046 ; 83.083,87.071 84.252,87.071 ; 83.109,80.188 83.388,80.188 ; 83.109,81.661 83.464,81.661 ; 83.109,82.067 83.541,82.067 ; 83.109,82.652 83.363,82.652 ; 83.109,83.109 83.744,83.109 ; 83.109,83.134 83.744,83.134 ; 83.109,83.16 83.769,83.16 ; 83.109,83.185 83.795,83.185 ; 83.109,83.922 83.464,83.922 ; 83.109,83.947 83.464,83.947 ; 83.109,83.972 83.464,83.972 ; 83.109,83.998 83.464,83.998 ; 83.109,84.023 83.49,84.023 ; 83.109,84.049 83.49,84.049 ; 83.109,84.074 83.49,84.074 ; 83.109,84.099 83.49,84.099 ; 83.109,84.125 83.49,84.125 ; 83.109,85.903 83.388,85.903 ; 83.109,87.097 84.252,87.097 ; 83.109,87.122 84.201,87.122 ; 83.134,79.121 83.769,79.121 ; 83.134,81.686 83.515,81.686 ; 83.134,82.626 83.388,82.626 ; 83.134,83.083 83.718,83.083 ; 83.134,84.15 83.515,84.15 ; 83.134,84.176 83.515,84.176 ; 83.134,84.201 83.515,84.201 ; 83.134,84.226 83.515,84.226 ; 83.134,84.252 83.515,84.252 ; 83.134,85.877 83.388,85.877 ; 83.134,87.147 84.15,87.147 ; 83.134,87.173 84.099,87.173 ; 83.16,77.445 83.566,77.445 ; 83.16,80.162 83.337,80.162 ; 83.16,80.696 83.363,80.696 ; 83.16,80.721 83.363,80.721 ; 83.16,80.747 83.363,80.747 ; 83.16,80.772 83.363,80.772 ; 83.16,80.797 83.363,80.797 ; 83.16,80.823 83.363,80.823 ; 83.16,80.848 83.337,80.848 ; 83.16,80.874 83.337,80.874 ; 83.16,80.899 83.337,80.899 ; 83.16,80.924 83.363,80.924 ; 83.16,80.95 83.363,80.95 ; 83.16,80.975 83.363,80.975 ; 83.16,81.001 83.363,81.001 ; 83.16,81.026 83.363,81.026 ; 83.16,81.051 83.363,81.051 ; 83.16,81.712 83.566,81.712 ; 83.16,82.093 83.566,82.093 ; 83.16,82.601 83.414,82.601 ; 83.16,83.058 83.464,83.058 ; 83.16,84.277 83.541,84.277 ; 83.16,84.303 83.541,84.303 ; 83.16,84.328 83.541,84.328 ; 83.16,84.353 83.541,84.353 ; 83.16,84.379 83.541,84.379 ; 83.16,85.852 83.414,85.852 ; 83.16,87.198 84.023,87.198 ; 83.185,79.096 83.769,79.096